# EAGLE board M850x_ (EAGLE 4.11)
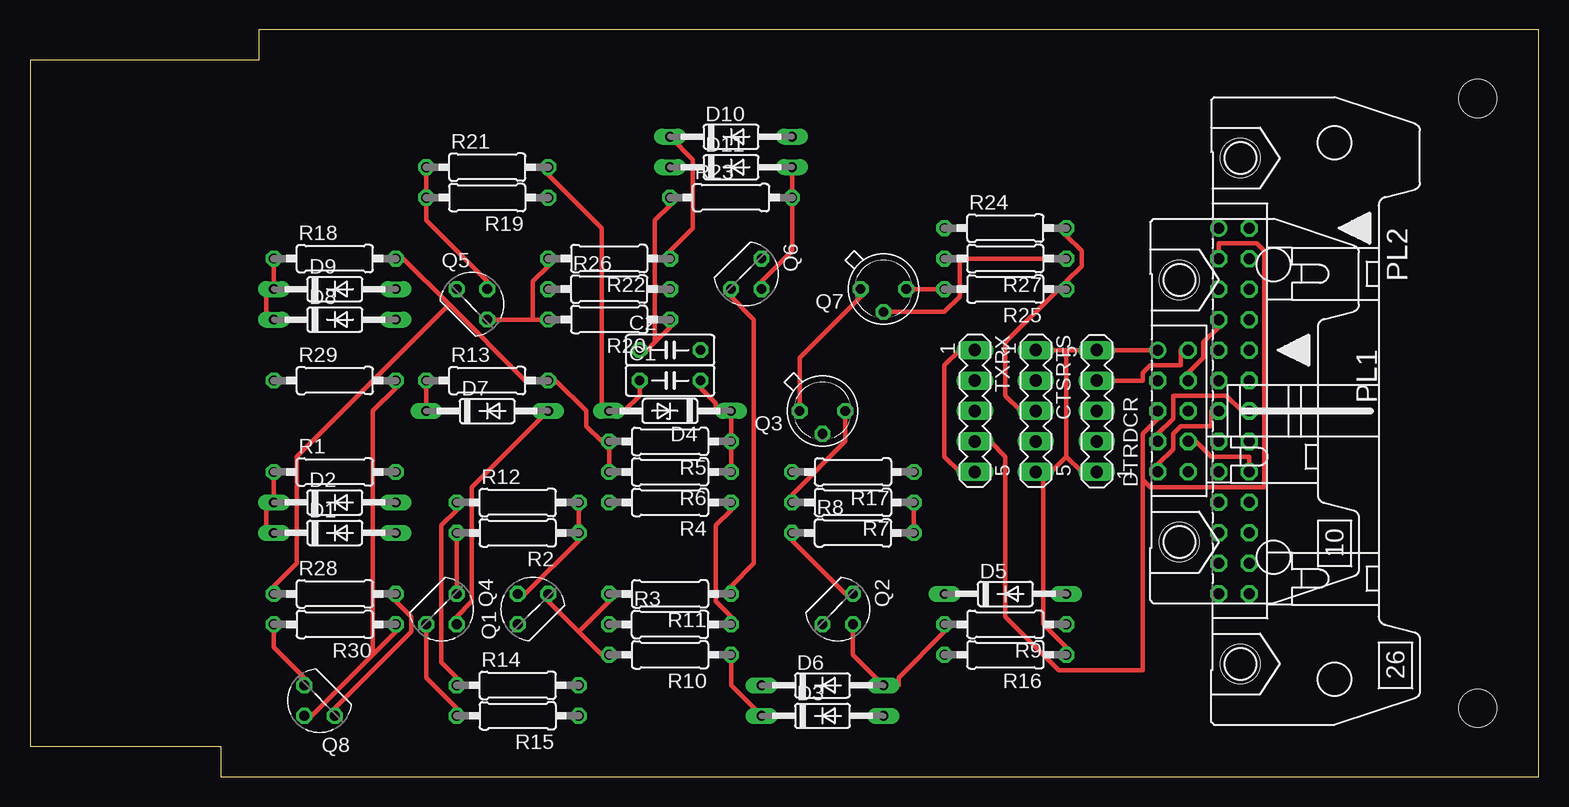
[diagram p0: board, top side]
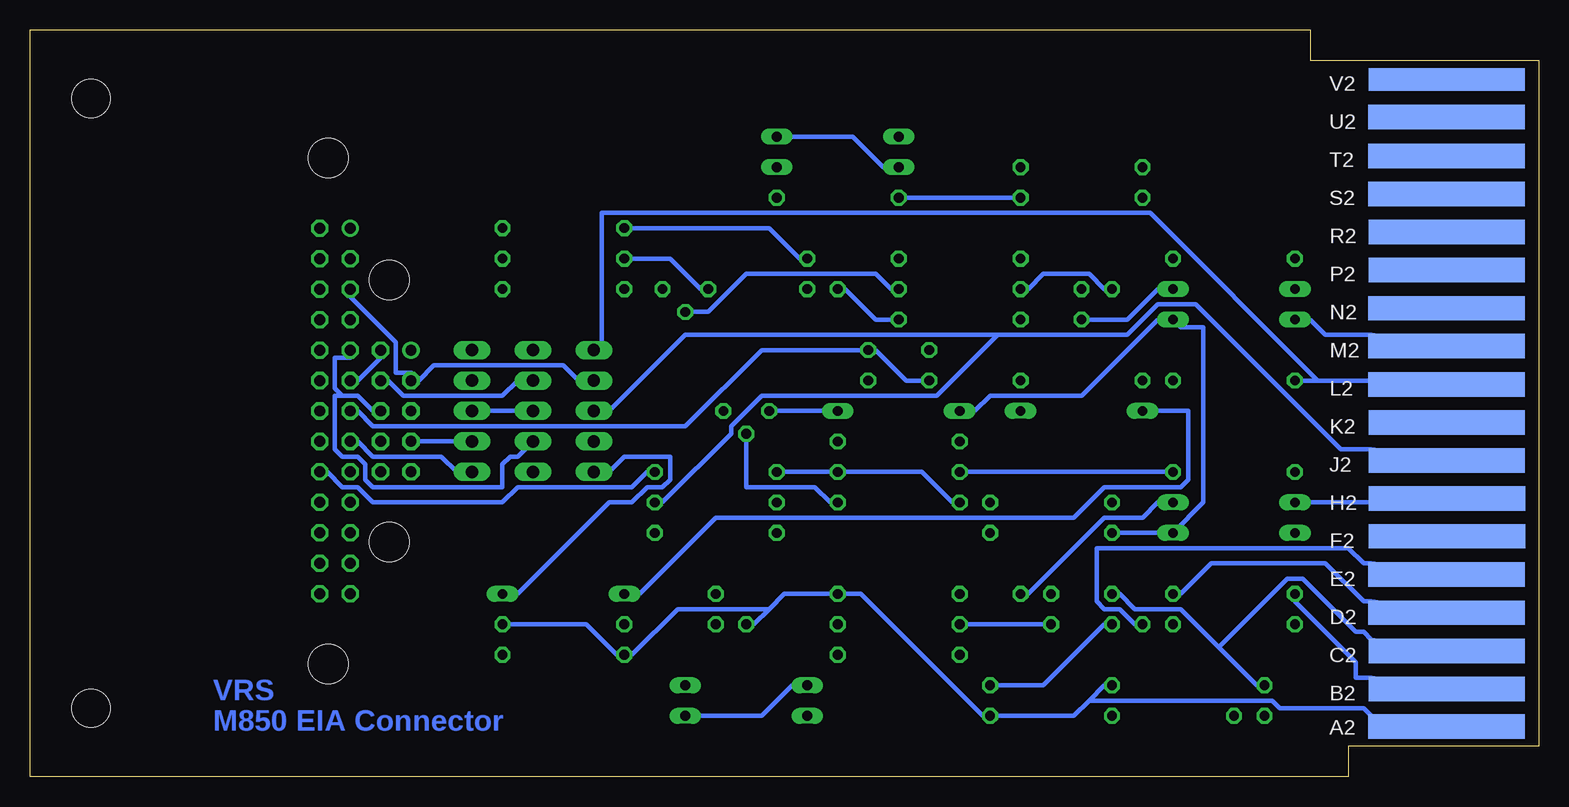
[diagram p1: board, bottom side, seen from below]

Size 125.73 x 62.23 mm. Coordinates in mm from the lower left corner, seen from the top.
Copper layers (1*16): Top 0.035mm / dielectric 1.5mm / Bottom 0.035mm
Design rules "15mils": minimum track width 15mil, minimum drill 24mil, track to track 15mil, track to pad 10mil, pad to pad 10mil, via to via 10mil, smd to smd 10mil, copper to edge 25mil, drill to drill 10mil, minimum pad ring 10mil, minimum via ring 8mil, stop-mask expansion 0mil, vias tented up to drill 0mil, thermal gap 10mil

## Footprints (pad centres in the part's own frame; a part is rotated, then mirrored left to right if it is on the bottom)
C050-025X075 = drill 0.813 octagon: 1 -2.54,0; 2 2.54,0
MA05-1 = drill 1.016 long: 1 -5.08,0; 2 -2.54,0; 3 0,0; 4 2.54,0; 5 5.08,0
DO35-10 = drill 0.813 long: A 5.08,0; C -5.08,0
DO35Z10 = drill 0.813 long: A 5.08,0; C -5.08,0
EDGE-CON1 = smd 13.017 x 2.032 bottom: A2 7.69,4.194; B2 7.668,7.328; C2 7.668,10.49; D2 7.693,13.665; E2 7.693,16.84; F2 7.642,20.041; H2 7.642,23.19; J2 7.668,26.34; K2 7.668,29.515; L2 7.693,32.69; M2 7.693,35.89; N2 7.693,39.04; P2 7.668,42.24; R2 7.668,45.39; S2 7.693,48.565; T2 7.693,51.74; U2 7.693,54.966 | smd 13.017 x 1.905 bottom: V2 7.668,58.102
10H = drill 0.914 round: 1 -5.08,-1.27 | drill 0.914 octagon: 2 -5.08,1.27; 3 -2.54,-1.27; 4 -2.54,1.27; 5 0,-1.27; 6 0,1.27; 7 2.54,-1.27; 8 2.54,1.27; 9 5.08,-1.27; 10 5.08,1.27 | hole 3.302: -10.922,0.533; 10.922,0.533
26H = drill 0.914 round: 1 -15.24,-1.27 | drill 0.914 octagon: 2 -15.24,1.27; 3 -12.7,-1.27; 4 -12.7,1.27; 5 -10.16,-1.27; 6 -10.16,1.27; 7 -7.62,-1.27; 8 -7.62,1.27; 9 -5.08,-1.27; 10 -5.08,1.27; 11 -2.54,-1.27; 12 -2.54,1.27; 13 0,-1.27; 14 0,1.27; 15 2.54,-1.27; 16 2.54,1.27; 17 5.08,-1.27; 18 5.08,1.27; 19 7.62,-1.27; 20 7.62,1.27; 21 10.16,-1.27; 22 10.16,1.27; 23 12.7,-1.27; 24 12.7,1.27; 25 15.24,-1.27; 26 15.24,1.27 | hole 3.302: -21.082,0.533; 21.082,0.533
TO92/ = drill 0.813 octagon: 1 1.27,-1.27; 2 1.27,1.27; 3 -1.27,1.27
TO18- = drill 0.813 octagon: 1 1.905,0; 2 0,1.905; 3 -1.905,0
0207/10 = drill 0.813 octagon: 1 -5.08,0; 2 5.08,0
SINGLE = hole 3.175: 120.65,56.515; 120.65,5.715

## Placement (x,y rotation side)
C1  .01uf  [C050-025X075]  53.34,33.02 0 top
C2  .01uf  [C050-025X075]  53.34,35.56 0 top
CTSRTS  [MA05-1]  83.82,30.48 270 top
D1  1N3606  [DO35-10]  25.4,20.32 0 top
D2  1N3606  [DO35-10]  25.4,22.86 0 top
D3  1N3606  [DO35-10]  66.04,5.08 0 top
D4  1N753  [DO35Z10]  53.34,30.48 180 top
D5  1N3606  [DO35-10]  81.28,15.24 0 top
D6  1N3606  [DO35-10]  66.04,7.62 0 top
D7  1N3606  [DO35-10]  38.1,30.48 0 top
D8  1N3606  [DO35-10]  25.4,38.1 0 top
D9  1N3606  [DO35-10]  25.4,40.64 0 top
D10  1N3606  [DO35-10]  58.42,53.34 0 top
D11  1N3606  [DO35-10]  58.42,50.8 0 top
DTRDCR  [MA05-1]  88.9,30.48 90 top
EDGE  EDGE-1  [EDGE-CON1]  0,0 0 top
PL1  [10H]  95.25,30.48 270 top
PL2  [26H]  100.33,30.48 270 top
Q1  6534B  [TO92/]  41.91,13.97 90 top
Q2  6534B  [TO92/]  67.31,13.97 270 top
Q3  3009B  [TO18-]  66.04,30.48 180 top
Q4  6534B  [TO92/]  34.29,13.97 270 top
Q5  6534B  [TO92/]  36.83,39.37 0 top
Q6  6534B  [TO92/]  59.69,41.91 270 top
Q7  3009B  [TO18-]  71.12,40.64 180 top
Q8  6534B  [TO92/]  24.13,6.35 180 top
R1  1.5K  [0207/10]  25.4,25.4 0 top
R2  15K  [0207/10]  40.64,20.32 180 top
R3  7.5K  [0207/10]  53.34,12.7 0 top
R4  1.5K  [0207/10]  53.34,22.86 180 top
R5  1K  [0207/10]  53.34,27.94 180 top
R6  1K  [0207/10]  53.34,25.4 180 top
R7  47  [0207/10]  68.58,22.86 180 top
R8  47  [0207/10]  68.58,20.32 0 top
R9  1.5K  [0207/10]  81.28,12.7 180 top
R10  1.5K  [0207/10]  53.34,10.16 180 top
R11  470  [0207/10]  53.34,15.24 180 top
R12  33K  [0207/10]  40.64,22.86 0 top
R13  15K  [0207/10]  38.1,33.02 0 top
R14  100K  [0207/10]  40.64,7.62 0 top
R15  1.5K  [0207/10]  40.64,5.08 180 top
R16  47  [0207/10]  81.28,10.16 180 top
R17  47  [0207/10]  68.58,25.4 180 top
R18  1.5K  [0207/10]  25.4,43.18 0 top
R19  33K  [0207/10]  38.1,48.26 180 top
R20  470  [0207/10]  48.26,38.1 180 top
R21  15K  [0207/10]  38.1,50.8 0 top
R22  1.5K  [0207/10]  48.26,43.18 180 top
R23  1.5K  [0207/10]  58.42,48.26 0 top
R24  47  [0207/10]  81.28,45.72 0 top
R25  47  [0207/10]  81.28,40.64 180 top
R26  7.5K  [0207/10]  48.26,40.64 0 top
R27  1.5K  [0207/10]  81.28,43.18 180 top
R28  1.5K  [0207/10]  25.4,15.24 0 top
R29  10K  [0207/10]  25.4,33.02 0 top
R30  1.5K  [0207/10]  25.4,12.7 180 top
TXRX  [MA05-1]  78.74,30.48 270 top
U$1  OUTLINE-SINGLE  [SINGLE]  0,0 0 top

## Library data of the parts
C1 C2 R1-R30 = rcl
CTSRTS DTRDCR TXRX = con-lstb
D1-D11 = diode
EDGE U$1 = dec-con
PL1 PL2 = con-harting-h
Q1-Q8 = transistor

## Nets
-15V: EDGE.B2 R1.2 R5.2 R6.2 R13.2 R18.2 R28.1
EIA2: PL1.3 PL2.5 TXRX.2
EIA3: PL1.5 PL2.3 TXRX.4
EIA4: DTRDCR.2 PL1.7 PL2.14
EIA6: DTRDCR.4 PL1.2 PL2.11
EIA7: CTSRTS.2 PL1.4 PL2.7
EIA8: CTSRTS.4 PL1.6 PL2.9
GND: C1.1 C2.2 D1.A D4.A D8.A EDGE.C2 PL1.9 PL2.13 Q4.3 Q8.1 R2.2 R21.2 R30.2
HI: CTSRTS.1 CTSRTS.5 DTRDCR.1 DTRDCR.5 PL1.1 PL2.15 R16.1
LO: PL1.8 PL2.18 R17.1
N$1: Q2.3 R8.1
N$2: D7.A Q4.2 R14.2
N$3: D9.A Q5.1 R20.2 R22.2
N$4: Q1.3 R3.1
N$5: Q5.2 R19.2 R21.1
N$6: D10.A D11.C
N$8: Q3.3 R7.2
N$9: D5.C D7.C R13.1
N$10: D2.A Q1.1 R10.2 R11.2
N$11: D6.A Q2.2 R9.2
N$12: Q1.2 R2.1 R12.2
N$13: D3.A D6.C
N$14: D3.C R10.1
N$15: Q3.2 R3.2 R4.1
N$16: Q8.2 R29.2 R30.1
N$17: D10.C R22.1
N$18: D11.A Q6.2 R23.2
N$19: Q6.3 R24.1
N$20: Q7.3 R25.2
N$21: Q5.3 R26.1
N$22: Q7.2 R26.2 R27.1
RDY: CTSRTS.3 DTRDCR.3 R24.2 R25.1
RRE: D8.C D9.C EDGE.M2 R18.1
RX: D5.A EDGE.L2 R29.1 TXRX.1 TXRX.5
TTID: EDGE.D2 Q8.3 R28.2
TTIE: EDGE.E2 Q4.1 R15.2
TTO: D1.C D2.C EDGE.H2 R1.1
TX: EDGE.J2 R7.1 R8.2 TXRX.3
VCC: C2.1 EDGE.A2 Q2.1 Q6.1 R9.1 R11.1 R12.1 R14.1 R15.1 R16.2 R19.1 R20.1 R23.1
VSS: C1.2 D4.C Q3.1 Q7.1 R4.2 R5.1 R6.1 R17.2 R27.2

## Tracks (layer width: path | path; a pad name or v marks a point on that pad's centre or on a via)
-15V
  Top 0.381: R6.2 R5.2 47.63,27.94 46.36,29.21 46.36,30.48 43.82,33.02 R13.2 41.28,33.02 34.93,39.37 | 34.93,39.37 31.12,43.18 R18.2 | 34.93,39.37 22.23,26.67 22.23,17.78 20.32,15.88 R28.1
  Bottom 0.381: R6.2 R1.2 | R28.1 20.32,14.61 15.24,9.53 15.24,8.26 13.97,8.26 EDGE.B2
EIA2
  Bottom 0.381: TXRX.2 80.01,33.02 81.28,34.29 92.08,34.29 93.35,33.02 PL1.3 93.98,33.66 95.25,33.66 95.25,36.2 99.06,40.01 PL2.5
EIA3
  Top 0.381: 92.71,24.77 92.71,28.57 93.98,29.84 PL1.5 | 92.71,24.77 93.35,24.13 102.87,24.13 102.87,43.81 102.24,44.45 99.06,44.45 PL2.3 | 92.71,24.77 92.71,8.89 85.73,8.89 81.28,13.34 81.28,26.67 80.01,27.94 TXRX.4
EIA4
  Top 0.381: PL2.14 100.97,30.48 99.7,31.75 95.25,31.75 95.25,29.84 93.98,28.57 PL1.7
  Bottom 0.381: DTRDCR.2 PL1.7
EIA6
  Top 0.381: DTRDCR.4 92.71,33.02 92.71,33.66 93.35,34.29 95.89,34.29 95.89,35.56 PL1.2
  Bottom 0.381: PL2.11 98.43,33.02 96.52,34.92 PL1.2
EIA7
  Top 0.381: PL1.4 96.52,33.66 97.79,34.92 97.79,36.2 99.06,37.47 PL2.7
  Bottom 0.381: CTSRTS.2 85.09,33.02 86.36,31.75 94.62,31.75 95.89,33.02 PL1.4
EIA8
  Bottom 0.381: 99.7,31.75 98.43,31.75 97.16,30.48 PL1.6 | 99.7,31.75 100.33,32.38 100.33,34.92 99.06,34.92 PL2.9 | 99.7,31.75 100.33,31.75 100.33,27.3 99.7,26.67 98.43,26.67 97.79,26.04 97.79,24.77 97.16,24.13 86.36,24.13 86.36,26.04 85.73,26.67 85.09,26.67 CTSRTS.4
GND
  Top 0.381: Q8.1 22.86,8.26 20.32,10.79 R30.2 | Q4.3 R2.2 | PL1.9 93.98,26.04 95.25,27.3 95.25,28.57 95.89,29.21 98.43,29.21 98.43,30.48 PL2.13 | C1.1 50.8,31.75 49.53,30.48 D4.A 47.63,31.11 47.63,45.72 43.18,50.16 R21.2
  Bottom 0.381: R2.2 D1.A 27.94,22.86 27.94,37.47 29.85,37.47 D8.A 31.75,38.1 38.1,31.75 45.72,31.75 46.99,30.48 D4.A | 26.67,10.79 29.85,13.97 33.66,13.97 34.93,15.24 Q4.3 | 26.67,10.79 23.5,7.62 Q8.1 | C1.1 52.71,33.02 55.25,35.56 C2.2 64.77,35.56 71.12,29.21 97.16,29.21 98.43,30.48 PL2.13 | 26.67,10.79 20.96,16.51 19.69,16.51 15.24,12.06 14.61,12.06 13.97,11.43 EDGE.C2
HI
  Top 0.381: PL1.1 DTRDCR.5 86.36,35.56 | 86.36,35.56 CTSRTS.1 | R16.1 86.36,10.79 84.46,12.7 84.46,24.77 CTSRTS.5 85.09,25.4 86.36,26.67 | 86.36,26.67 86.36,35.56 | 86.36,26.67 87.63,25.4 DTRDCR.1
  Bottom 0.381: PL2.15 98.43,27.94 97.16,26.67 91.44,26.67 90.17,25.4 DTRDCR.1
LO
  Top 0.381: PL1.8 97.16,27.94 98.43,26.67 101.6,26.67 PL2.18
  Bottom 0.381: R17.1 74.3,25.4 75.57,24.13 85.09,24.13 86.36,22.86 97.16,22.86 98.43,24.13 99.7,24.13 100.97,25.4 PL2.18
N$1
  Top 0.381: R8.1 63.5,19.68 67.95,15.24 Q2.3
N$2
  Top 0.381: D7.A 36.83,24.13 36.83,14.61 35.56,13.34 Q4.2
  Bottom 0.381: Q4.2 36.2,12.7 41.28,7.62 R14.2
N$3
  Top 0.381: 41.91,38.1 R20.2 | Q5.1 41.91,38.1 | 41.91,38.1 41.91,41.27 43.18,42.55 R22.2
  Bottom 0.381: D9.A 31.75,40.64 34.29,38.1 Q5.1
N$4
  Bottom 0.381: Q1.3 R3.1
N$5
  Top 0.381: R21.1 R19.2 33.02,46.35 38.1,41.27 Q5.2
N$6
  Bottom 0.381: D11.C 54.61,50.8 57.15,53.34 D10.A
N$8
  Top 0.381: R7.2 63.5,23.5 67.95,27.94 Q3.3
N$9
  Top 0.381: D7.C R13.1
  Bottom 0.381: D5.C 74.93,15.24 68.58,21.59 38.74,21.59 36.2,24.13 29.85,24.13 29.21,24.77 29.21,30.48 D7.C
N$10
  Top 0.381: 45.72,12.06 43.18,14.61 Q1.1 | 45.72,12.06 47.63,10.16 R10.2 | 45.72,12.06 48.26,14.61 R11.2
  Bottom 0.381: D2.A 31.75,22.86 33.02,21.59 36.2,21.59 42.55,15.24 Q1.1
N$11
  Top 0.381: Q2.2 68.58,10.16 D6.A 72.39,7.62 72.39,8.26 76.2,12.06 R9.2
N$12
  Top 0.381: Q1.2 41.28,15.24 45.72,19.68 R2.1 R12.2
N$13
  Bottom 0.381: D6.C 62.23,7.62 64.77,5.08 D3.A
N$14
  Top 0.381: D3.C 58.42,7.62 R10.1
N$15
  Top 0.381: R3.2 58.42,13.34 57.15,14.61 57.15,20.95 58.42,22.23 R4.1
  Bottom 0.381: Q3.2 66.04,24.13 60.33,24.13 59.06,22.86 R4.1
N$16
  Top 0.381: 28.58,10.16 30.48,12.06 R30.1 | 28.58,10.16 23.5,5.08 Q8.2 | 28.58,10.16 28.58,30.48 30.48,32.38 R29.2
N$17
  Top 0.381: R22.1 53.34,43.81 55.25,45.72 55.25,51.44 D10.C
N$18
  Top 0.381: Q6.2 60.96,41.27 63.5,43.81 R23.2 D11.A
N$19
  Bottom 0.381: Q6.3 61.6,43.18 64.14,45.72 R24.1
N$20
  Top 0.381: Q7.3 R25.2
N$21
  Bottom 0.381: Q5.3 36.2,40.64 37.47,41.91 41.28,41.91 42.55,40.64 R26.1
N$22
  Top 0.381: R27.1 77.47,43.18 77.47,40.01 76.2,38.73 Q7.2
  Bottom 0.381: R26.2 53.98,40.64 55.25,41.91 66.04,41.91 69.22,38.73 Q7.2
RDY
  Top 0.381: R24.2 86.36,45.09 87.63,43.81 87.63,42.55 86.36,41.27 R25.1 85.73,40.64 81.28,36.2 81.28,31.75 82.55,30.48 CTSRTS.3
  Bottom 0.381: CTSRTS.3 DTRDCR.3
RRE
  Top 0.381: D8.C 19.69,38.73 19.69,40.01 D9.C R18.1
  Bottom 0.381: D8.C 19.05,38.1 17.78,36.83 13.97,36.83 EDGE.M2
RX
  Top 0.381: TXRX.1 77.47,35.56 76.2,34.29 76.2,26.67 77.47,25.4 TXRX.5
  Bottom 0.381: D5.A 85.09,15.24 77.47,22.86 75.57,22.86 74.3,24.13 73.03,24.13 72.39,24.77 72.39,26.67 76.2,26.67 77.47,25.4 TXRX.5 | 18.42,33.02 13.97,33.02 EDGE.L2 | 18.42,33.02 R29.1 | 18.42,33.02 32.39,46.99 78.11,46.99 78.11,36.2 TXRX.1
TTID
  Top 0.381: Q8.3 25.4,5.71 31.75,12.06 31.75,13.34 30.48,14.61 R28.2
  Bottom 0.381: R28.2 29.85,15.24 27.31,17.78 17.78,17.78 14.61,14.61 13.97,14.61 EDGE.D2
TTIE
  Top 0.381: R15.2 35.56,5.71 33.02,8.26 Q4.1
  Bottom 0.381: Q4.1 33.66,12.7 34.93,13.97 36.2,13.97 36.83,14.61 36.83,19.05 15.88,19.05 14.61,17.78 13.97,17.78 EDGE.E2
TTO
  Top 0.381: D1.C 19.69,20.95 19.69,22.23 D2.C R1.1
  Bottom 0.381: D2.C 13.97,22.86 EDGE.H2
TX
  Top 0.381: R7.1 R8.2
  Bottom 0.381: 45.09,36.83 34.29,36.83 31.75,39.37 28.58,39.37 16.51,27.3 13.97,27.3 EDGE.J2 | 45.09,36.83 71.12,36.83 77.47,30.48 TXRX.3 | 45.09,36.83 50.17,31.75 64.77,31.75 67.31,29.21 67.31,28.57 73.03,22.86 R7.1
VCC
  Top 0.381: 52.07,36.2 53.34,37.47 R20.1 | 52.07,36.2 51.44,35.56 C2.1 | 52.07,36.2 52.07,46.35 53.34,47.62 R23.1 | R12.1 35.56,22.23 34.29,20.95 34.29,9.53 35.56,8.26 R14.1 | Q6.1 58.42,40.01 60.33,38.1 60.33,17.78 58.42,15.88 R11.1
  Bottom 0.381: R23.1 R19.1 | Q6.1 57.79,40.64 55.25,38.1 R20.1 | R9.1 79.38,12.7 76.84,10.16 R16.2 75.57,10.16 71.76,13.97 64.14,13.97 | 37.47,6.35 38.74,5.08 R15.1 46.36,5.08 56.52,15.24 R11.1 62.87,15.24 64.14,13.97 | 37.47,6.35 36.2,7.62 R14.1 | 64.14,13.97 65.41,12.7 Q2.1 | 37.47,6.35 22.23,6.35 21.59,5.71 14.61,5.71 13.97,5.08 EDGE.A2
VSS
  Top 0.381: R6.1 R5.1 D4.C 57.15,30.48 57.15,31.11 55.88,32.38 C1.2 | Q7.1 69.22,40.01 64.14,34.92 Q3.1
  Bottom 0.381: Q7.1 69.85,40.64 72.39,43.18 R27.2 | R4.2 48.9,22.86 51.44,25.4 R6.1 R17.2 | D4.C Q3.1

## Text on the board
Bottom: VRS | M850 EIA Connector